# Altium PCB FQDMDPCBv1.1.PcbDoc (part 2 of 2)
Units mil, origin at the board's own origin, x right, y up, seen from the top; angles counter-clockwise.
Board outline 4880 x 5300 mil, 2 copper layers (Top Layer, Bottom Layer); 36 components, 29 nets, 122 pads, 0 vias.
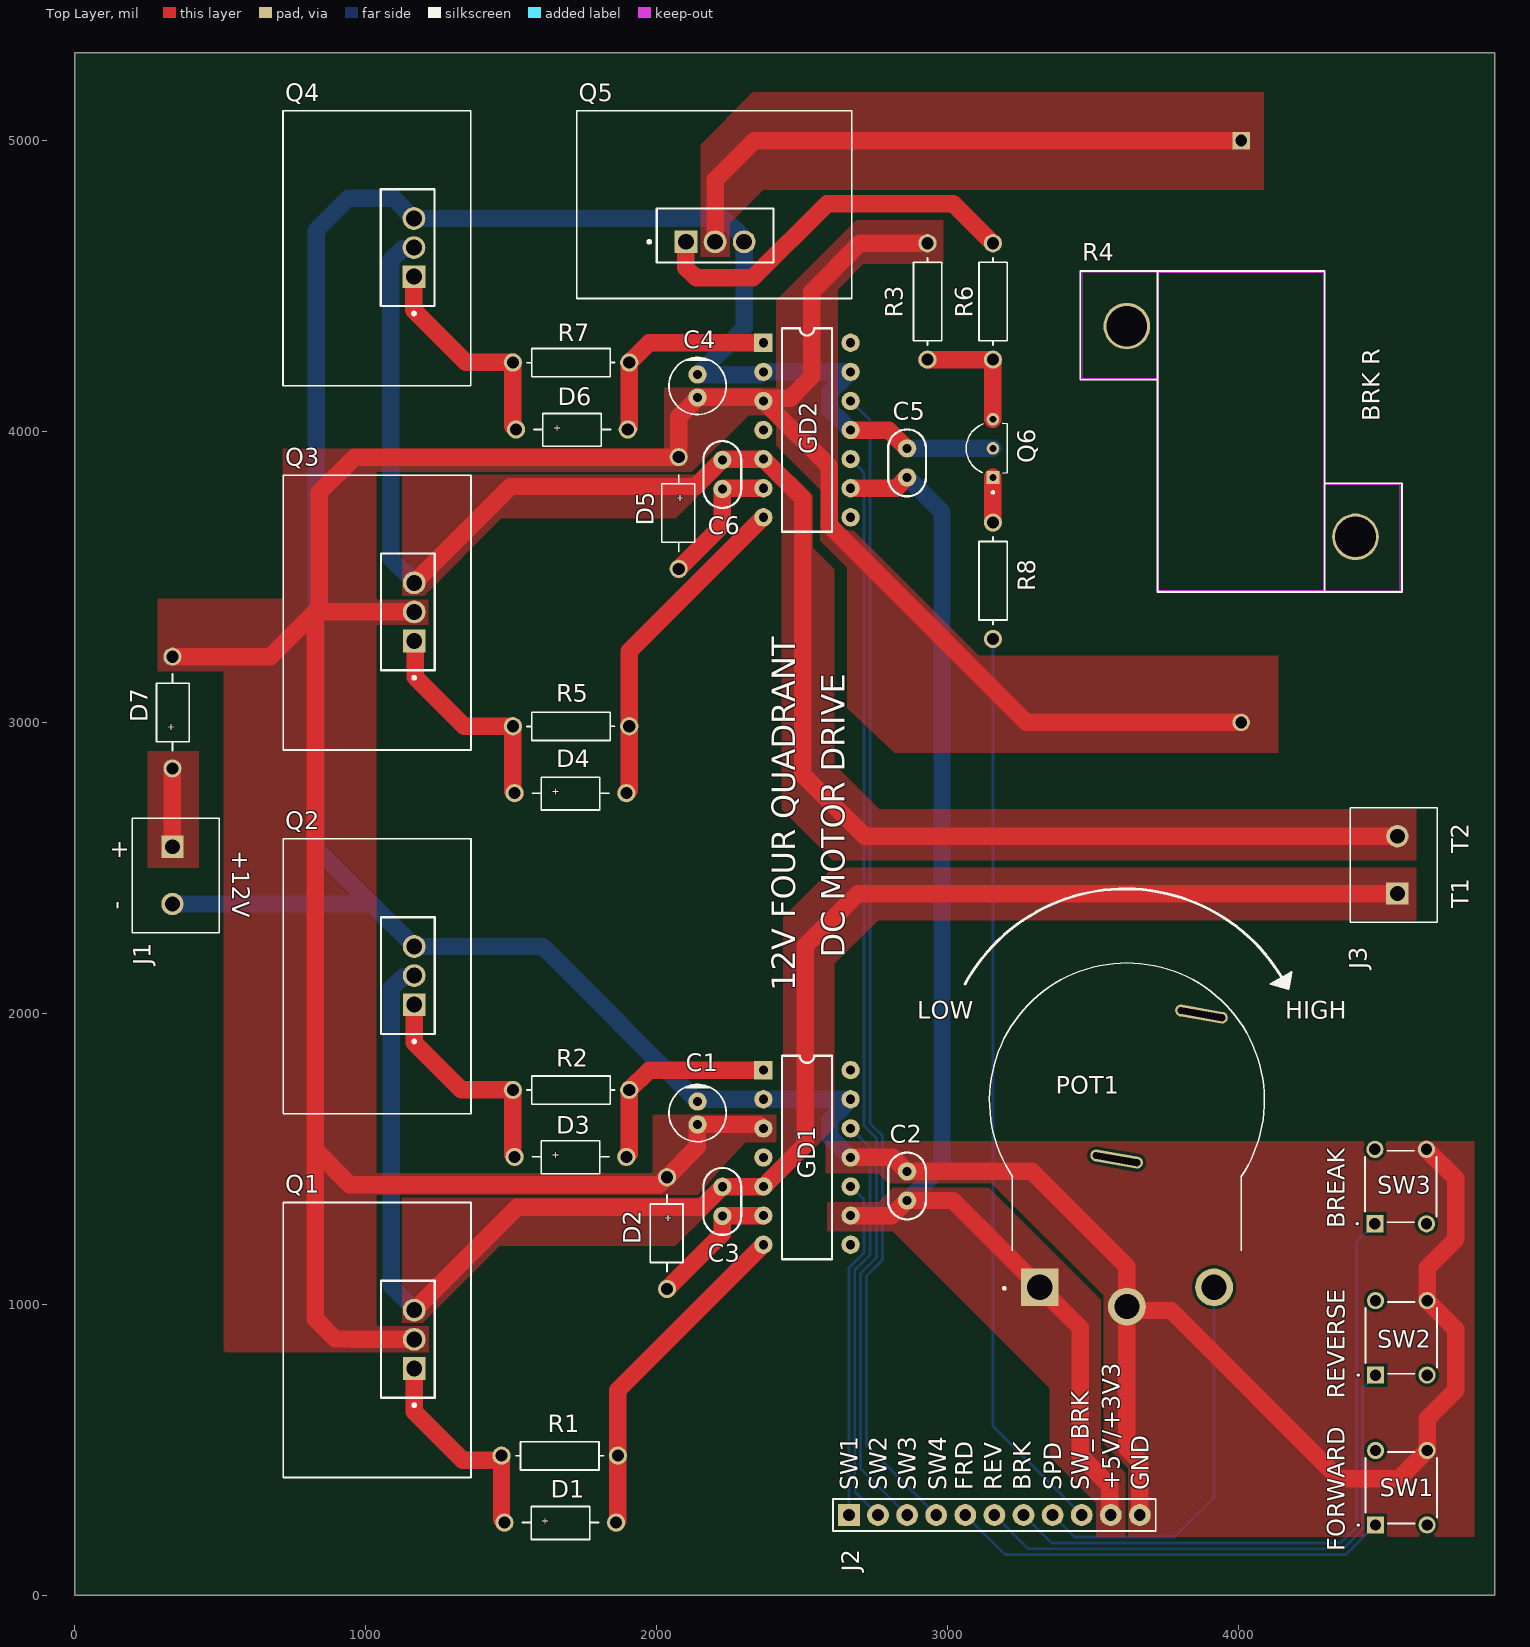
[diagram p0: Top Layer view]

## Part data (continued)
R1 R2 R5 R6 R7: library part CFR-50JB-52-10R, "RES 10 OHM 5% 1/2W AXIAL", Case/Package=Axial, Manufacturer="Yageo Group", Max Operating Temperature=155°C, Max Power Dissipation=500mW, Min Operating Temperature=-55°C, Ratings=AEC-Q200, Supplier Part Number=13-CFR-50JB-52-10R-ND, Temperature Coefficient=500ppm/°C, Tolerance=5%, Working Voltage=350V, Category="Through-Hole Resistors", China RoHS=Compliant, ComponentLink1Description=https://datasheet.octopart.com:443/CFR-50JB-52-10R-Yageo-datasheet-175860721.pdf?src-supplier=Farnell, ComponentLink1URL=https://datasheet.octopart.com:443/CFR-50JB-52-10R-Yageo-datasheet-175860721.pdf?src-supplier=Farnell, ComponentLink2Description=https://datasheet.octopart.com:443/CFR-50JB-52-10R-Yageo-Group-datasheet-184398216.pdf?src-supplier=Future+Electronics, ComponentLink2URL=https://datasheet.octopart.com:443/CFR-50JB-52-10R-Yageo-Group-datasheet-184398216.pdf?src-supplier=Future+Electronics, ComponentLink3Description=https://datasheet.octopart.com:443/CFR-50JB-52-10R-Yageo-datasheet-165493773.pdf?src-supplier=Future+Electronics, ComponentLink3URL=https://datasheet.octopart.com:443/CFR-50JB-52-10R-Yageo-datasheet-165493773.pdf?src-supplier=Future+Electronics, ComponentLink4Description=https://datasheet.octopart.com:443/CFR-50JB-52-10R-Yageo-datasheet-155367611.pdf?src-supplier=Future+Electronics, ComponentLink4URL=https://datasheet.octopart.com:443/CFR-50JB-52-10R-Yageo-datasheet-155367611.pdf?src-supplier=Future+Electronics, ComponentLink5Description=https://datasheet.octopart.com:443/CFR-50JB-52-10R-Yageo-datasheet-137875058.pdf?src-supplier=Future+Electronics, ComponentLink5URL=https://datasheet.octopart.com:443/CFR-50JB-52-10R-Yageo-datasheet-137875058.pdf?src-supplier=Future+Electronics, ComponentLink6Description=http://sigma.octopart.com:80/conflict_mineral_statement/Yageo-company-3.pdf?src-supplier=Compliance+Statements, ComponentLink6URL=http://sigma.octopart.com:80/conflict_mineral_statement/Yageo-company-3.pdf?src-supplier=Compliance+Statements, ComponentLink7Description=http://sigma.octopart.com:80/rohs_statement/Yageo-company-2.pdf?src-supplier=Compliance+Statements, ComponentLink7URL=http://sigma.octopart.com:80/rohs_statement/Yageo-company-2.pdf?src-supplier=Compliance+Statements, Composition="Carbon Film", Diameter=3.3mm, Lead Diameter=550µm, Lead Length=26mm, Length=9mm, Lifecycle Status=Production, Manufacturer Part Number=CFR-50JB-52-10R, Number of Terminals=2, Number of Terminations=2, Packaging=Bulk, Power Rating=500mW, Pricing="1=0.1, 10=0.05, 25=0.0416, 50=0.0364, 100=0.032, 250=0.0272, 500=0.02418, 1000=0.02161, 5000=0.01702 (USD)", REACH SVHC=Yes, RoHS=Compliant, Stock=18511, Supplier=DigiKey
R3: library part CFR50SJT-52-1K, "RES 1K OHM 5% 1/2W AXIAL", Manufacturer="Yageo Group", Max Operating Temperature=155°C, Min Operating Temperature=-55°C, Power Rating=500mW, Ratings=AEC-Q200, Supplier Part Number=13-CFR50SJT-52-1KCT-ND, Tolerance=5%, Working Voltage=300V, Category="Through-Hole Resistors", China RoHS=Compliant, ComponentLink1Description=https://datasheet.octopart.com:443/CFR50SJT-52-1K-Yageo-datasheet-175860721.pdf?src-supplier=IHS, ComponentLink1URL=https://datasheet.octopart.com:443/CFR50SJT-52-1K-Yageo-datasheet-175860721.pdf?src-supplier=IHS, ComponentLink2Description=https://datasheet.octopart.com:443/CFR50SJT-52-1K-Yageo-datasheet-155367611.pdf?src-supplier=Farnell, ComponentLink2URL=https://datasheet.octopart.com:443/CFR50SJT-52-1K-Yageo-datasheet-155367611.pdf?src-supplier=Farnell, ComponentLink3Description=https://datasheet.octopart.com:443/CFR50SJT-52-1K-Yageo-Group-datasheet-184398216.pdf?src-supplier=Future+Electronics, ComponentLink3URL=https://datasheet.octopart.com:443/CFR50SJT-52-1K-Yageo-Group-datasheet-184398216.pdf?src-supplier=Future+Electronics, ComponentLink4Description=https://datasheet.octopart.com:443/CFR50SJT-52-1K-Yageo-datasheet-137875058.pdf?src-supplier=Future+Electronics, ComponentLink4URL=https://datasheet.octopart.com:443/CFR50SJT-52-1K-Yageo-datasheet-137875058.pdf?src-supplier=Future+Electronics, ComponentLink5Description=https://datasheet.octopart.com:443/CFR50SJT-52-1K-Yageo-datasheet-28066625.pdf?src-supplier=Future+Electronics, ComponentLink5URL=https://datasheet.octopart.com:443/CFR50SJT-52-1K-Yageo-datasheet-28066625.pdf?src-supplier=Future+Electronics, ComponentLink6Description=http://sigma.octopart.com:80/conflict_mineral_statement/Yageo-company-3.pdf?src-supplier=Compliance+Statements, ComponentLink6URL=http://sigma.octopart.com:80/conflict_mineral_statement/Yageo-company-3.pdf?src-supplier=Compliance+Statements, ComponentLink7Description=http://sigma.octopart.com:80/rohs_statement/Yageo-company-2.pdf?src-supplier=Compliance+Statements, ComponentLink7URL=http://sigma.octopart.com:80/rohs_statement/Yageo-company-2.pdf?src-supplier=Compliance+Statements, Composition="Carbon Film", Country of Origin="Mainland China, Taiwan", Diameter=2.4mm, Export Control Classification Number (ECCN) Code=EAR99, Harmonized Tariff Schedule (HTS) Code=8533.10.00.65, Introduction Date=2007-10-26, Lead Diameter=550µm, Length=6.3mm, Lifecycle Status=Production, Manufacturer Part Number=CFR50SJT-52-1K, Number of Terminals=2, Pricing="1=0.1, 10=0.048, 25=0.0404, 50=0.0352, 100=0.031, 250=0.02632, 500=0.02338, 1000=0.02089 (USD)", REACH SVHC=Yes, RoHS=Compliant, Stock=8784, Supplier=DigiKey
R4: library part KAL25FB10R0, "RES CHAS MNT 10 OHM 1% 25W", Manufacturer="Stackpole Electronics", Max Operating Temperature=275°C, Max Power Dissipation=25W, Min Operating Temperature=-55°C, Supplier Part Number=KAL25FB10R0-ND, Temperature Coefficient=30ppm/°C, Tolerance=1%, Category="Chassis Mount Resistors", ComponentLink1Description=https://datasheet.octopart.com:443/KAL25FB10R0-Stackpole-Electronics-datasheet-170576574.pdf?src-supplier=IHS, ComponentLink1URL=https://datasheet.octopart.com:443/KAL25FB10R0-Stackpole-Electronics-datasheet-170576574.pdf?src-supplier=IHS, ComponentLink2Description=https://datasheet.octopart.com:443/KAL25FB10R0-Stackpole-Electronics-datasheet-137738308.pdf?src-supplier=Master+Electronics, ComponentLink2URL=https://datasheet.octopart.com:443/KAL25FB10R0-Stackpole-Electronics-datasheet-137738308.pdf?src-supplier=Master+Electronics, ComponentLink3Description=https://datasheet.octopart.com:443/KAL25FB10R0-Stackpole-Electronics-datasheet-163747744.pdf?src-supplier=Master+Electronics, ComponentLink3URL=https://datasheet.octopart.com:443/KAL25FB10R0-Stackpole-Electronics-datasheet-163747744.pdf?src-supplier=Master+Electronics, ComponentLink4Description=https://datasheet.octopart.com:443/KAL25FB10R0-Stackpole-Electronics-datasheet-32593518.pdf?src-supplier=Stackpole+Electronics, ComponentLink4URL=https://datasheet.octopart.com:443/KAL25FB10R0-Stackpole-Electronics-datasheet-32593518.pdf?src-supplier=Stackpole+Electronics, ComponentLink5Description=https://datasheet.octopart.com:443/KAL25FB10R0-Stackpole-Electronics-datasheet-17020207.pdf?src-supplier=Factory+Futures, ComponentLink5URL=https://datasheet.octopart.com:443/KAL25FB10R0-Stackpole-Electronics-datasheet-17020207.pdf?src-supplier=Factory+Futures, ComponentLink6Description=http://sigma.octopart.com:80/141158211/reach_statement/Stackpole-Electronics-KAL25FB10R0.pdf?src-supplier=Compliance+Statements, ComponentLink6URL=http://sigma.octopart.com:80/141158211/reach_statement/Stackpole-Electronics-KAL25FB10R0.pdf?src-supplier=Compliance+Statements, ComponentLink7Description=http://sigma.octopart.com:80/141158212/rohs_statement/Stackpole-Electronics-KAL25FB10R0.pdf?src-supplier=Compliance+Statements, ComponentLink7URL=http://sigma.octopart.com:80/141158212/rohs_statement/Stackpole-Electronics-KAL25FB10R0.pdf?src-supplier=Compliance+Statements, Composition=Wirewound, Features="Moisture Resistant", Height=13.87mm, Housing Material=Aluminium, Lead/Base Style=Solder, Length=26.97mm, Lifecycle Status=Production, Manufacturer Part Number=KAL25FB10R0, Mounting Technology="Chassis Mount", Number of Terminals=2, Packaging=Bulk, Power Rating=25W, Pricing="1=5.22, 10=3.546, 25=3.092, 50=2.8076, 100=2.5658, 250=2.30096, 500=2.1353, 1000=1.99459, 5000=1.75 (USD)", Radiation Hardening=No, REACH SVHC=Yes, RoHS=Compliant, Stock=500, Supplier=DigiKey, Width=27.43mm
R8: library part CFR-50JT-52-4K7, "RES 4.7K OHM 5% 1/2W AXIAL", Case/Package=Conformal, Manufacturer="Yageo Group", Max Operating Temperature=155°C, Min Operating Temperature=-55°C, Power Rating=500mW, Ratings=AEC-Q200, Supplier Part Number=13-CFR-50JT-52-4K7CT-ND, Temperature Coefficient=350ppm/°C, Tolerance=5%, Working Voltage=350V, Category="Through-Hole Resistors", China RoHS=Compliant, ComponentLink1Description=https://datasheet.octopart.com:443/CFR-50JT-52-4K7-Yageo-datasheet-175860721.pdf?src-supplier=Newark, ComponentLink1URL=https://datasheet.octopart.com:443/CFR-50JT-52-4K7-Yageo-datasheet-175860721.pdf?src-supplier=Newark, ComponentLink2Description=https://datasheet.octopart.com:443/CFR-50JT-52-4K7-Yageo-datasheet-12509909.pdf?src-supplier=_legacy+Avnet, ComponentLink2URL=https://datasheet.octopart.com:443/CFR-50JT-52-4K7-Yageo-datasheet-12509909.pdf?src-supplier=_legacy+Avnet, ComponentLink3Description=https://datasheet.octopart.com:443/CFR-50JT-52-4K7-Yageo-Group-datasheet-184398216.pdf?src-supplier=Future+Electronics, ComponentLink3URL=https://datasheet.octopart.com:443/CFR-50JT-52-4K7-Yageo-Group-datasheet-184398216.pdf?src-supplier=Future+Electronics, ComponentLink4Description=https://datasheet.octopart.com:443/CFR-50JT-52-4K7-Yageo-datasheet-165493773.pdf?src-supplier=Future+Electronics, ComponentLink4URL=https://datasheet.octopart.com:443/CFR-50JT-52-4K7-Yageo-datasheet-165493773.pdf?src-supplier=Future+Electronics, ComponentLink5Description=https://datasheet.octopart.com:443/CFR-50JT-52-4K7-Yageo-datasheet-155367611.pdf?src-supplier=Future+Electronics, ComponentLink5URL=https://datasheet.octopart.com:443/CFR-50JT-52-4K7-Yageo-datasheet-155367611.pdf?src-supplier=Future+Electronics, ComponentLink6Description=https://datasheet.octopart.com:443/CFR-50JT-52-4K7-Yageo-datasheet-137875058.pdf?src-supplier=Future+Electronics, ComponentLink6URL=https://datasheet.octopart.com:443/CFR-50JT-52-4K7-Yageo-datasheet-137875058.pdf?src-supplier=Future+Electronics, ComponentLink7Description=https://datasheet.octopart.com:443/CFR-50JT-52-4K7-Yageo-datasheet-28066625.pdf?src-supplier=Future+Electronics, ComponentLink7URL=https://datasheet.octopart.com:443/CFR-50JT-52-4K7-Yageo-datasheet-28066625.pdf?src-supplier=Future+Electronics, ComponentLink8Description=https://datasheet.octopart.com:443/CFR-50JT-52-4K7-Yageo-datasheet-17276704.pdf?src-supplier=Future+Electronics, ComponentLink8URL=https://datasheet.octopart.com:443/CFR-50JT-52-4K7-Yageo-datasheet-17276704.pdf?src-supplier=Future+Electronics, ComponentLink9Description=http://sigma.octopart.com:80/conflict_mineral_statement/Yageo-company-3.pdf?src-supplier=Compliance+Statements, ComponentLink9URL=http://sigma.octopart.com:80/conflict_mineral_statement/Yageo-company-3.pdf?src-supplier=Compliance+Statements, ComponentLink10Description=http://sigma.octopart.com:80/rohs_statement/Yageo-company-2.pdf?src-supplier=Compliance+Statements, ComponentLink10URL=http://sigma.octopart.com:80/rohs_statement/Yageo-company-2.pdf?src-supplier=Compliance+Statements, Composition="Carbon Film", Contact Plating=Tin, Country of Origin="Mainland China, Taiwan", Diameter=3.3mm, Export Control Classification Number (ECCN) Code=EAR99, Harmonized Tariff Schedule (HTS) Code=8533.10.00.65, Introduction Date=2007-10-26, Lead Diameter=550µm, Lead Free="Lead Free", Length=9mm, Lifecycle Status=Production, Manufacturer Part Number=CFR-50JT-52-4K7, Military Standard=Not, Mounting Technology="Through Hole", Number of Terminals=2, Pricing="1=0.1, 10=0.05, 25=0.0416, 50=0.0364, 100=0.032, 250=0.0272, 500=0.02418 (USD)", Radiation Hardening=No, REACH SVHC=Yes, RoHS=Compliant, Stock=9950, Supplier=DigiKey, Termination=Axial
SW1 SW2 SW3: "SWITCH TACTILE SPST-NO 0.05A 24V", Color=Black, Contact Current Rating=50mA, Contact Resistance=100mΩ, Manufacturer="TE Connectivity", Manufacturer Lifecycle Status=ACTIVE, Max Operating Temperature=85°C, Max Voltage Rating (DC)=24V, Min Operating Temperature=-35°C, Operating Force=1.568N, Supplier Part Number=450-1644-ND, Actuator Length=4.9mm, Actuator Material="Nylon, Polyamide", Category="Pushbutton Switches", China RoHS=Compliant, ComponentLink1Description=https://sigma.octopart.com:443/101748000/technical_drawing/TE-Connectivity-3-1825910-5.pdf?src-supplier=Sager+Electronics, ComponentLink1URL=https://sigma.octopart.com:443/101748000/technical_drawing/TE-Connectivity-3-1825910-5.pdf?src-supplier=Sager+Electronics, ComponentLink2Description=https://datasheet.octopart.com:443/3-1825910-5-TE-Connectivity-datasheet-10294628.pdf?src-supplier=TE+Connectivity, ComponentLink2URL=https://datasheet.octopart.com:443/3-1825910-5-TE-Connectivity-datasheet-10294628.pdf?src-supplier=TE+Connectivity, ComponentLink3Description=https://datasheet.octopart.com:443/3-1825910-5-TE-Connectivity-datasheet-58177301.pdf?src-supplier=TE+Connectivity, ComponentLink3URL=https://datasheet.octopart.com:443/3-1825910-5-TE-Connectivity-datasheet-58177301.pdf?src-supplier=TE+Connectivity, ComponentLink4Description=https://sigma.octopart.com:443/12291753/technical_drawing/TE-Connectivity-3-1825910-5.pdf?src-supplier=Burklin+Elektronik, ComponentLink4URL=https://sigma.octopart.com:443/12291753/technical_drawing/TE-Connectivity-3-1825910-5.pdf?src-supplier=Burklin+Elektronik, ComponentLink5Description=https://datasheet.octopart.com:443/3-1825910-5-TE-Connectivity-datasheet-33009270.pdf?src-supplier=Newark, ComponentLink5URL=https://datasheet.octopart.com:443/3-1825910-5-TE-Connectivity-datasheet-33009270.pdf?src-supplier=Newark, ComponentLink6Description=https://datasheet.octopart.com:443/3-1825910-5-Tyco-Electronics-datasheet-10028384.pdf?src-supplier=Newark, ComponentLink6URL=https://datasheet.octopart.com:443/3-1825910-5-Tyco-Electronics-datasheet-10028384.pdf?src-supplier=Newark, ComponentLink7Description=https://datasheet.octopart.com:443/FSM18JH-Alcoswitch-datasheet-160371.pdf?src-supplier=Master+Electronics, ComponentLink7URL=https://datasheet.octopart.com:443/FSM18JH-Alcoswitch-datasheet-160371.pdf?src-supplier=Master+Electronics, ComponentLink8Description=https://datasheet.octopart.com:443/3-1825910-5-TE-Connectivity---AMP-datasheet-189108451.pdf?src-supplier=Master+Electronics, ComponentLink8URL=https://datasheet.octopart.com:443/3-1825910-5-TE-Connectivity---AMP-datasheet-189108451.pdf?src-supplier=Master+Electronics, ComponentLink9Description=https://datasheet.octopart.com:443/3-1825910-5-TE-Connectivity-datasheet-145421083.pdf?src-supplier=RS+(Formerly+Allied+Electronics), ComponentLink9URL=https://datasheet.octopart.com:443/3-1825910-5-TE-Connectivity-datasheet-145421083.pdf?src-supplier=RS+(Formerly+Allied+Electronics), ComponentLink10Description=https://datasheet.octopart.com:443/FSM18JH-TE-Connectivity-datasheet-512274.pdf?src-supplier=RS+(Formerly+Allied+Electronics), ComponentLink10URL=https://datasheet.octopart.com:443/FSM18JH-TE-Connectivity-datasheet-512274.pdf?src-supplier=RS+(Formerly+Allied+Electronics), ComponentLink11Description=https://datasheet.octopart.com:443/3-1825910-5-TE-Connectivity-datasheet-165583917.pdf?src-supplier=TME, ComponentLink11URL=https://datasheet.octopart.com:443/3-1825910-5-TE-Connectivity-datasheet-165583917.pdf?src-supplier=TME, ComponentLink12Description=https://datasheet.octopart.com:443/3-1825910-5-TE-Connectivity---AMP-datasheet-27860381.pdf?src-supplier=Electro+Sonic, ComponentLink12URL=https://datasheet.octopart.com:443/3-1825910-5-TE-Connectivity---AMP-datasheet-27860381.pdf?src-supplier=Electro+Sonic, ComponentLink13Description=https://datasheet.octopart.com:443/3-1825910-5-Tyco-Electronics-datasheet-11788987.pdf?src-supplier=Arrow+Electronics, ComponentLink13URL=https://datasheet.octopart.com:443/3-1825910-5-Tyco-Electronics-datasheet-11788987.pdf?src-supplier=Arrow+Electronics, ComponentLink14Description=http://sigma.octopart.com:80/14574724/rohs_statement/TE-Connectivity-3-1825910-5.pdf?src-supplier=Compliance+Statements, ComponentLink14URL=http://sigma.octopart.com:80/14574724/rohs_statement/TE-Connectivity-3-1825910-5.pdf?src-supplier=Compliance+Statements, Contact Material=Silver, Contact Plating=Silver, Current Rating=50mA, Electrical Life=100kcycles, ELV=Compliant, Export Control Classification Number (ECCN) Code=EAR99, Harmonized Tariff Schedule (HTS) Code=8536.50.90.40, Height=3.61mm, Housing Material=Nylon, Illumination Type="Illuminated, Non-Illuminated", Introduction Date=2008-01-30, Lead Free="Lead Free", Length=5.99mm, Lifecycle Status=Production, Manufacturer Part Number=3-1825910-5, Max Current Rating=50mA, Mechanical Life=100kcycles, Mounting Technology="PCB, Through Hole", Number of Positions=1, Orientation=Straight, Packaging=Bulk, Pricing="1=0.16, 10=0.144, 25=0.1348, 100=0.1213, 250=0.1126, 750=0.10273, 1500=0.09697, 3000=0.09163, 5250=0.08765 (USD)", Radiation Hardening=No, REACH SVHC=Yes, RoHS=Compliant, Schedule B=8536509065, Stock=31248, Supplier=DigiKey, Switch Function=Off-Mom, Switch Travel=250µm, Termination=Solder, Throw Configuration=SPST, Type=Switch, Voltage Rating (DC)=24V

## Nets (pads, with @x,y where several pads share a name; then routed paths per layer and width w, separated by ;. In a path a pad name is that pad's centre, name@x,y a point inside that pad or via, vN(x,y) a via of type N, cw(c..) or ccw(c..) an arc to the next point about the centre after c; other vN are vias at no path point)
+12V: C1.1 C4.1 D2.1 D5.1 D7.2 GD1.3 GD2.3 Q1.2 Q3.2 R3.2 R4.2 | length 10761.4
  Top Layer w60: D7.2 671.37,3225 825.37,3379 ; Q1.2 951,879 950,880 895,880 825.37,949.63 825.37,1529.63 ; Q3.2 825.37,3379 ; GD1.3 2365.19,1604 2351.93,1617.26 C1.1 2139.43,1616.69 2139.43,1540.43 D2.1 2034.3,1436 2008.3,1410 945,1410 825.37,1529.63 ; GD2.3@2367.38,4104.57 2376.81,4114 2458,4114 2532,4188 2532,4480 2698,4646 R3.2 ; R4.2 3269.89,2999 2592,3676.89 2592,3879.11 2395.61,4075.5 2395.31,4075.5 2366.81,4104 GD2.3 2365.19,4104 2353.19,4116 C4.1 2140,4115.19 2075,4050.19 D5.1 961,3911 840,3790 840,3393.63 825.37,3379 ; 825.37,1529.63 825.37,3379
BRK: J2.7 SW3.1 | length 2275
  Bottom Layer w10: J2.7 3355.98,179.02 4349.02,179.02 4405,235 4405,1213.17 SW3.1
CON_LOG: C2.2 C5.2 GD1.9 GD2.9 J2.10 POT1.1 | length 4473.3
  Top Layer w60: GD1.9 2807.19,1304 2859.19,1356 C2.2 3017.79,1356 POT1.1 3455,918.79 3455,478 3557.17,375.83 3557.17,277.83 J2.10 ; GD2.9 2822.19,3804 2859.19,3841 C5.2
  Bottom Layer w60: C2.2 2860.57,1356.57 2861.68,1356.57 2980,1474.89 2980,3721 C5.2
FRD: J2.5 SW1.1 | length 1508.6
  Bottom Layer w10: J2.5 3195.98,139.02 4368.02,139.02 SW1.1
GND: C1.2 C2.1 C4.2 C5.1 GD1.2 GD1.11 GD1.13 GD2.2 GD2.11 GD2.13 J1.2 J2.11 POT1.2 Q2.3 Q4.3 Q5.3 Q6.2 SW1.4 SW2.4 SW3.4 | length 13172.7
  Top Layer w60: GD1.11 2811.19,1504 2859.19,1456 C2.1 3289,1456 3615.55,1129.45 POT1.2 ; GD2.11 2796.19,4004 2859.19,3941 C5.1 ; J2.11 3660,459.79 3615.55,504.24 POT1.2 ; SW3.4 4745,1431.91 4745,1222.51 4647.17,1124.68 SW2.4 4745,914.07 4745,703.93 4647.17,606.1 SW1.4 4550.26,400 4345,400 3767.04,977.96 3628.93,977.96 POT1.2
  Bottom Layer w60: J1.2 1020,2375 ; GD1.2@2365.19,1704 2148.81,1704 2140.81,1696 C1.2 1607,2229 Q2.3 1020,2375 ; GD1.2 GD1.13@2665.19,1704 ; GD1.11 2665.19,1504 2636.69,1532.5 2636.39,1532.5 2594.5,1574.39 2594.5,1633.61 2636.39,1675.5 2636.69,1675.5 GD1.13@2665.19,1704 ; GD1.13 GD1.13@2665.19,1704 ; GD2.11 2665.19,4004 2636.69,4032.5 2636.39,4032.5 2594.5,4074.39 2594.5,4133.61 2636.39,4175.5 2636.69,4175.5 2665.19,4204 GD2.13 2365.19,4204 2355.93,4194.74 C4.2 2294.5,4349.24 2294.5,4352.06 2300,4357.56 Q5.3 2296.49,4654.51 2296.49,4666.48 2231.97,4731 Q4.3 1096,4800 940,4800 830,4690 830,2565 1020,2375 ; C5.1 Q6.2
MOTOR_T1: C3.1 GD1.5 J3.1 Q1.3 Q2.2 | length 5608.9
  Top Layer w60: Q1.3 1519.61,1332.61 2153.5,1332.61 2195.39,1374.5 2195.69,1374.5 2224.19,1403 2364.19,1403 2365.19,1404 GD1.5 2366.81,1404 2395.31,1432.5 2395.61,1432.5 2510,1546.89 2510,2231 2690,2411 J3.1
  Bottom Layer w60: Q1.3 1166,983.96 1086.83,1063.14 1086.83,2084.74 1127.57,2125.49 1162.49,2125.49 Q2.2
MOTOR_T2: C6.1 GD2.5 J3.2 Q3.3 Q4.2 | length 5884.5
  Top Layer w60: Q3.3 1497,3810 2132.89,3810 2195.39,3872.5 2195.69,3872.5 2223.62,3900.43 C6.1@2224.43,3900.43 ; C6.1@2225.98,3901.98 2226.38,3901.57 2228.81,3904 GD2.5 2366.81,3904 2395.31,3875.5 2395.61,3875.5 2502,3769.11 2502,2820 2714.15,2607.85 J3.2
  Bottom Layer w60: Q4.2 1161.49,4627.49 1126.57,4627.49 1085.83,4586.74 1085.83,3564.14 1166,3483.96 Q3.3
NetC3_2: C3.2 D2.2 GD1.6 | length 471.1
  Top Layer w60: D2.2 2224.43,1241.43 2224.43,1302.43 C3.2 2364.19,1303 2365.19,1304 GD1.6
NetC6_2: C6.2 D5.2 GD2.6 | length 477.3
  Top Layer w60: D5.2 2225,3677 C6.2 ; C6.2@2225.98,3801.98 2226.38,3801.57 2228.81,3804 GD2.6
NetD1_2: D1.2 GD1.7 R1.2 | length 1164.6
  Top Layer w60: D1.2 1860,249.7 1866,255.7 R1.2 1866,704 GD1.7
NetD3_2: D3.2 GD1.1 R2.2 | length 722.6
  Top Layer w60: D3.2 1895,1506.7 1905,1516.7 R2.2@1905,1735.3 ; R2.2 1973,1804 GD1.1
NetD4_2: D4.2 GD2.7 R5.2 | length 1143.1
  Top Layer w60: D4.2 1895,2756.7 1905,2766.7 R5.2 1905,3243 GD2.7
NetD6_2: D6.2 GD2.1 R7.2 | length 721.2
  Top Layer w60: D6.2 1900,4006.7 1905,4011.7 R7.2 1973,4304 GD2.1
NetD7_1: D7.1 J1.1 | length 269.1
  Top Layer w60: J1.1 D7.1
NetQ5_1: Q5.1 R6.2 | length 1319.7
  Top Layer w60: Q5.1 2100,4562.15 2135.15,4527 2330,4527 2585,4782 3019,4782 R6.2@3154.5,4646.5
NetQ5_2: Q5.2 R4.1 | length 2077.5
  Top Layer w60: Q5.2 2200,4865 2334,4999 R4.1
NetQ6_1: Q6.1 R8.2 | length 155
  Top Layer w60: R8.2 Q6.1
NetQ6_3: Q6.3 R3.1 R6.1 | length 430
  Top Layer w60: R3.1 R6.1 Q6.3
REV: J2.6 SW2.1 | length 1890
  Bottom Layer w10: J2.6 3275.98,159.02 4359.02,159.02 4425,225 4425,711 SW2.1
SPEED: J2.8 POT1.3 | length 1364.7
  Bottom Layer w10: J2.8 3435,200 3780,200 3915.04,335.04 POT1.3
SW1: D1.1 Q1.1 R1.1 | length 758.9
  Top Layer w60: Q1.1 1166,630 1333,463 1449.3,463 1465.3,479 R1.1 1466,259.7 1476,249.7 D1.1
SW1_CON: GD1.10 J2.1 | length 1170
  Bottom Layer w10: J2.1 2660,1125 2712.5,1177.5 2712.5,1357.5 GD1.10
SW2: D3.1 Q2.1 R2.1 | length 769.6
  Top Layer w60: Q2.1 1166,1898 1327.5,1736.5 1504.5,1736.5 R2.1 1505,1512.7 1511,1506.7 D3.1
SW2_CON: GD1.12 J2.2 | length 1411.4
  Bottom Layer w10: GD1.12 2732.5,1537.5 2732.5,1169.21 2680,1116.72 2680,355 J2.2
SW3: D4.1 Q3.1 R5.1 | length 763.1
  Top Layer w60: Q3.1 1169.81,3275.19 1169.81,3155.19 1338.5,2986.5 1504.5,2986.5 R5.1 1505,2762.7 1511,2756.7 D4.1
SW3_CON: GD2.10 J2.3 | length 3754.9
  Bottom Layer w10: GD2.10 2712.5,3857.5 2712.5,1612.5 2755,1570 2755,1160 2700,1105 2700,435 J2.3
SW4: D6.1 Q4.1 R7.1 | length 764.7
  Top Layer w60: Q4.1 1165,4415 1343.5,4236.5 1504.5,4236.5 R7.1 1505,4017.7 1516,4006.7 D6.1
SW4_CON: GD2.12 J2.4 | length 3997.2
  Bottom Layer w10: GD2.12 2732.5,4037.5 2732.5,1620.79 2776,1577.28 2776,1152.72 2720,1096.72 2720,515 J2.4
SW_BRK: J2.9 R8.1 | length 3137.3
  Bottom Layer w10: R8.1 3155,580 J2.9
pads on no net: GD1.4 GD1.8 GD1.14 GD2.4 GD2.8 GD2.14 POT1.S1 POT1.S2 R4.3 R4.4 SW1.2 SW1.3 SW2.2 SW2.3 SW3.2 SW3.3

## Polygon pours and split planes (outlines as drawn)
NetD7_1 on Top Layer "NETD7_1_L01_P030" (solid, pour order 30): 250,2500 425,2500 425,2900 250,2900
NetQ5_2 on Top Layer "NETQ5_2_L01_P026" (solid, pour order 26): 2150,4600 2250,4600 2250,4715 2365,4830 4085,4830 4085,5165 2330,5165 2150,4985
GND on Top Layer "GND_L01_P039" (solid, pour order 39): 2760,1450 2795,1415 3150,1415 3535,1030 3535,520 3620,435 3620,200 4810,200 4810,1560 2580,1560 2580,1450
CON_LOG on Top Layer "CON_LOG_L01_P038" (solid, pour order 38): 2585,1350 2585,1250 2810,1250 3350,710 3350,475 3510,315 3510,200 3610,200 3610,420 3525,505 3525,1015 3140,1400 2810,1400 2760,1350
+12V on Top Layer "+12V_L01_P012" (solid, pour order 12): 2685,4725 2985,4725 2985,4575 2710,4575 2621,4486 2621,3850 2563,3797 2410,3950 2410,4450
+12V on Top Layer "+12V_L01_P015" (solid, pour order 15): 2562,3681.58 2562,3623 2655,3530 2655,3047 2818.16,2895 4135,2895 4135,3229 3105.94,3229 2676.23,3658.39 2649.6,3661.4 2622,3689 2592,3686
MOTOR_T2 on Top Layer "MOTOR_T2_L01_P020" (solid, pour order 20): 2430,2700 2605,2525 4610,2525 4610,2700 2765,2700 2610,2855 2610,3525 2535,3600 2535,3780 2470,3845 2430,3805
MOTOR_T1 on Top Layer "MOTOR_T1_L01_P019" (solid, pour order 19): 4610,2500 4610,2320 2760,2320 2610,2170 2610,1605 2480,1475 2442.5,1507.5 2435,1515 2435,2330 2605,2500
MOTOR_T1 on Top Layer "MOTOR_T1_L01_P018" (solid, pour order 18): 1125,935 1195,935 1460,1200 2063,1200 2174,1311 2174,1365 1125,1365
MOTOR_T2 on Top Layer "MOTOR_T2_L01_P017" (solid, pour order 17): 1125,3435 1200,3435 1465,3700 2065,3700 2160,3795 2160,3850 1125,3850
+12V on Top Layer "+12V_L01_P010" (solid, pour order 10): 1985,1376 1035,1376 1035,1450 1985,1450
+12V on Top Layer "+12V_L01_P009" (solid, pour order 9): 1035,3425 1035,3860 2025,3860 2025,3940 715,3940 715,3425
+12V on Top Layer "+12V_L01_P006" (solid, pour order 6): 2411,4150 2411,4055.14 2317.09,4055.14 2315.14,4055.14 2120,3860 2025,3860 2025,4150
+12V on Top Layer "+12V_L01_P003" (solid, pour order 3): 512,3175 1035,3175 1035,930 1042,923 1215,923 1216,922 1216,835 511,835 510,836 512,838
+12V on Top Layer "+12V_L01_P004" (solid, pour order 4): 2411,1650 2411,1555 2304.16,1555.52 2225.5,1469.5 2140,1376 1985,1376 1985,1650
+12V on Top Layer "+12V_L01_P002" (solid, pour order 2): 385,3175 1035,3175 1035,3330 386,3330 385,3329
+12V on Top Layer "+12V_L01_P000" (solid, pour order 0): 285,3175 285,3425 1035,3425 1040,3420 1215,3420 1214,3419 1214,3335 1040,3335 1035,3330 386,3330 385,3329 385,3175
no net on Top Overlay "NONET_L-01_P-001" (solid): 4110,2100 4169.83,2082.77 4180,2140
no net on Top Overlay "NONET_L-01_P-001" (none): 4110,2100 4169.83,2082.77 4180,2140
GND on Bottom Layer "GND_L02_P035" (solid, remove dead copper, pour order 35): 0,0 0,5300 4880,5300 4880,0
CON_LOG on Bottom Layer "CON_LOG_L02_P031" (solid, pour order 31): 2910,3700 2862.44,3797.16 2910,3832.87 3060,3700 3060,1513 2941.62,1394.62 2910,1421.52
MOTOR_T2 on Bottom Layer "MOTOR_T2_L02_P023" (solid, pour order 23): 1010,4675 1260,4675 1260,3435 1010,3435
MOTOR_T1 on Bottom Layer "MOTOR_T1_L02_P025" (solid, pour order 25): 1010,2175 1260,2175 1260,937 1010,937

## Silkscreen, mask and mechanical layers (free items; w line width, h text height)
Top Overlay:
  lines w6: 4110,2100 4169.83,2082.77 4180,2140 4110,2100
  lines w10: 3059.04,2099.7 cw(c3610,1800) 4166.31,2089.64
  text "BRK R" at 4484.99,4035.05 h60 r90
  text "+12V" at 540.01,2559.97 h60 r270
  text "T2" at 4789.99,2550.02 h60 r90
  text "+" at 120,2535 h60
  text "T1" at 4789.99,2360.01 h60 r90
  text "-" at 169.99,2355 h60 r90
  text "DC MOTOR DRIVE" at 2644.99,2190.17 h80 r90
  text "12V FOUR QUADRANT" at 2474.99,2075.21 h80 r90
  text "LOW" at 2895.03,1980.01 h60
  text "HIGH" at 4160.03,1980.01 h60
  text "BREAK" at 4364.99,1260.05 h60 r90
  text "REVERSE" at 4364.99,675.06 h60 r90
  text "SW1" at 2689.99,360.07 h60 r90
  text "SW2" at 2789.99,360.07 h60 r90
  text "SW3" at 2889.99,360.07 h60 r90
  text "SW4" at 2994.99,360.07 h60 r90
  text "FRD" at 3084.99,360.07 h60 r90
  text "REV" at 3184.99,360.07 h60 r90
  text "BRK" at 3284.99,360.07 h60 r90
  text "SPD" at 3389.99,360.07 h60 r90
  text "SW_BRK" at 3484.99,360.07 h60 r90
  text "+5V/+3V3" at 3589.99,360.07 h60 r90
  text "GND" at 3689.99,360.07 h60 r90
  text "FORWARD" at 4364.99,150.06 h60 r90
Bottom Overlay:
  text "DESIGNED BY: HARSHAK V P" at 2569.99,3638.03 h80 r90
  text "[C] 2026" at 2389.99,3008.24 h80 r90
Board Shape:
  the board outline again, w6

## Text inside footprints (layer, text, board x,y; h text height)
D1: Top Overlay "+" at 1603,234.87 h40
D2: Top Overlay "+" at 2020.87,1309 h40 r270
D3: Top Overlay "+" at 1638,1491.87 h40
D4: Top Overlay "+" at 1638,2741.87 h40
D5: Top Overlay "+" at 2060.87,3784 h40 r270
D6: Top Overlay "+" at 1643,3991.87 h40
D7: Top Overlay "+" at 349.13,2968 h40 r90
SW1: Top Overlay "•" at 4435.5,228.5 h50 r90
SW2: Top Overlay "•" at 4435.5,743.5 h50 r90
SW3: Top Overlay "•" at 4433.33,1263.5 h50 r90